# EAGLE board eeZee_microSD (EAGLE 6.4)
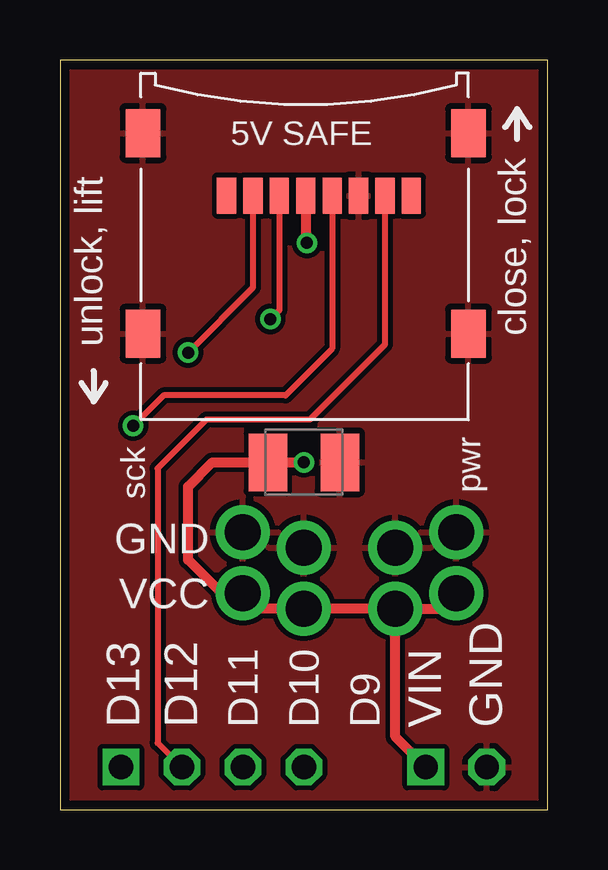
[diagram p0: board, top side]
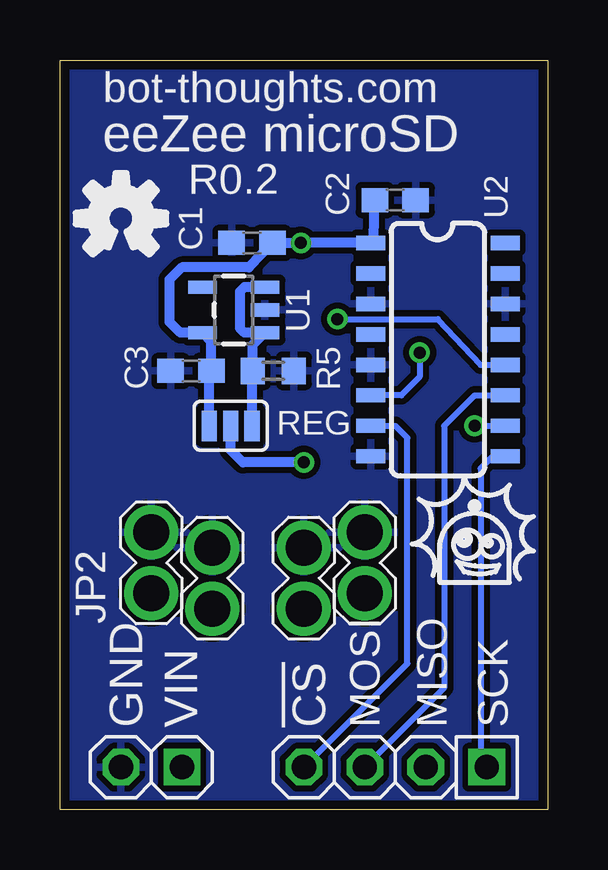
[diagram p1: board, bottom side, seen from below]

Size 20.32 x 31.24 mm. Coordinates in mm from the lower left corner, seen from the top.
Outline: 0,0 20.32,0 20.32,31.24 0,31.24 0,0
Copper layers (1*16): Top 0.0356mm / dielectric 1.5011mm / Bottom 0.0356mm
Design rules "LaenPCBOrder *": minimum track width 6mil, minimum drill 13mil, track to track 6mil, track to pad 6mil, pad to pad 6mil, via to via 6mil, smd to smd 6mil, copper to edge 15mil, drill to drill 6mil, minimum pad ring 7mil, minimum via ring 7mil, stop-mask expansion 4mil, vias tented up to drill 21mil, thermal gap 10mil

## Footprints (pad centres in the part's own frame; a part is rotated, then mirrored left to right if it is on the bottom)
C0603 = smd 1.1 x 1: 1 -0.85,0; 2 0.85,0
SMC_B = smd 1.6 x 2.4: + -1.5,0; - 1.5,0
1X02-S = drill 1.016 square: 1 -1.27,0 | drill 1.016 octagon: 2 1.27,0
BIGPIN-2 = drill 1.5: P$1 0,0; P$2 2.54,0
1X04-S = drill 1.016 square: 1 -3.81,0 | drill 1.016 octagon: 2 -1.27,0; 3 1.27,0; 4 3.81,0
R0603 = smd 1 x 1.1: 1 -0.85,0; 2 0.85,0
SJ_3 = smd 0.635 x 1.27: 1 -0.889,0; 2 0,0; 3 0.889,0
SOT23-5 = smd 0.55 x 1.2: 1 -0.95,-1.3; 2 0,-1.3; 3 0.95,-1.3; 4 0.95,1.3; 5 -0.95,1.3
SO016 = smd 0.6 x 1.2: 1 -4.445,-2.8; 2 -3.175,-2.8; 3 -1.905,-2.8; 4 -0.635,-2.8; 5 0.635,-2.8; 6 1.905,-2.8; 7 3.175,-2.8; 8 4.445,-2.8; 9 4.445,2.8; 10 3.175,2.8; 11 1.905,2.8; 12 0.635,2.8; 13 -0.635,2.8; 14 -1.905,2.8; 15 -3.175,2.8; 16 -4.445,2.8
TFLASH_CP-0000-086 = smd 0.8 x 1.5: CS 8.98,2.6; DI 7.88,2.6; DO 3.48,2.6; GND 4.58,2.6; NC 10.08,2.6; RSV 2.38,2.6; SCLK 5.68,2.6; VDD 6.78,2.6 | smd 1.45 x 2: SHIELD1 0,8.35; SHIELD2 13.56,8.35; SHIELD3 13.56,0; SHIELD4 0,0

## Placement (x,y rotation side)
C1  1uF  [C0603]  12.32,23.62 180 bottom
C2  0.1uF  [C0603]  6.35,25.4 0 bottom
C3  0.1uF  [C0603]  14.86,18.29 180 bottom
C4  10uF  [SMC_B]  10.16,14.48 0 top
JP1  [1X02-S]  16.51,1.78 180 bottom
JP2  PWR  [BIGPIN-2]  16.51,9.02 90 bottom
JP3  PWR  [BIGPIN-2]  10.16,8.38 90 bottom
JP4  PWR  [BIGPIN-2]  13.97,8.38 90 bottom
JP5  PWR  [BIGPIN-2]  7.62,9.02 90 bottom
JP6  [1X04-S]  6.35,1.78 180 bottom
R5  10K  [R0603]  11.43,18.29 180 bottom
REG  BYP  [SJ_3]  13.21,16 0 bottom
U1  MCP1824S  [SOT23-5]  13.08,20.83 90 bottom
U2  74HC4050  [SO016]  4.57,19.18 270 bottom
U$1  MICROSD_TFLASH  [TFLASH_CP-0000-086]  17.02,28.19 180 top

## Library data of the parts
C1 = rcl; PARTNO: LMK107B7105KA-T
C2-C4 = rcl; DATABASE: ./../../../eagle/PARTSDB.TXT; PARTNO: LMK107B7105KA-T
JP1 JP6 = pinhead-2
JP2 JP4 JP5 = mes_electromech; DATABASE: ./../../../eagle/PARTSDB.TXT
JP3 U$1 = mes_electromech
R5 = rcl; DATABASE: ./../PARTSDB.TXT; PARTNO: ERJ-3GEYJ103V
REG U2 = SparkFun
U1 = mes_regulators; IOUT: 300mA; PARTNO: MCP1824ST-3302E/DB; VOUT: 3.3V

## Nets
!CS_HV: JP6.4 U2.7
!SS: U2.6 U$1.CS
GND: C1.2 C2.2 C3.2 C4.- JP1.2 JP2.P$2 JP3.P$2 JP4.P$2 JP5.P$2 R5.1 U1.2 U2.3 U2.5 U2.8 U2.14 U$1.GND U$1.SHIELD1 U$1.SHIELD2 U$1.SHIELD3 U$1.SHIELD4
MISO: JP6.2 U$1.DO
MOSI: U2.12 U$1.DI
MOSI_HV: JP6.3 U2.11
SCK: U2.10 U$1.SCLK
SCK_HV: JP6.1 U2.9
VBOARD: C4.+ JP1.1 JP2.P$1 JP3.P$1 JP4.P$1 JP5.P$1 REG.2
VCC: C1.1 C2.1 C3.1 REG.1 U1.5 U2.1 U$1.VDD
VREGIN: R5.2 REG.3 U1.1 U1.3

## Tracks (layer width: path | path; a pad name or v marks a point on that pad's centre or on a via)
!CS_HV
  Bottom 0.254: JP6.4 5.84,6.1 5.84,15.49 6.35,16 U2.7
!SS  (via drill 0.5)
  Top 0.254: U$1.CS 8.04,21.75 v5.33,19.05
  Bottom 0.254: v5.33,19.05 5.33,18.03 6.1,17.27 U2.6
GND
  pour Bottom (isolate 0.254): 20.32,31.24 20.32,0 0,0 0,31.24
  pour Top (isolate 0.203): 20.32,31.24 20.32,0 0,0 0,31.24
MISO
  Top 0.254: U$1.DO 13.54,19.38 10.41,16.26 6.1,16.26 4.06,14.22 4.06,2.79 JP6.2
MOSI  (via drill 0.5)
  Top 0.254: U$1.DI 9.14,20.82 v8.76,20.45
  Bottom 0.254: v8.76,20.45 4.57,20.45 2.79,18.54 U2.12
MOSI_HV
  Bottom 0.254: JP6.3 4.32,5.08 4.32,16 3.05,17.27 U2.11
SCK  (via drill 0.5)
  Top 0.254: U$1.SCLK 11.34,19.21 9.4,17.27 4.32,17.27 v3.05,16
  Bottom 0.254: v3.05,16 U2.10
SCK_HV
  Bottom 0.254: U2.9 2.29,14.73 2.79,14.22 2.79,2.03 JP6.1
VBOARD  (via drill 0.5)
  Top 0.406: JP1.1 13.97,3.05 JP4.P$1 | JP4.P$1 15.88,8.38 JP2.P$1 | JP4.P$1 JP3.P$1 8.26,8.38 JP5.P$1 6.73,9.02 5.33,10.41 5.33,13.46 6.35,14.48 C4.+ v10.16,14.48
  Bottom 0.406: v10.16,14.48 12.7,14.48 13.21,14.99 REG.2
VCC  (via drill 0.5)
  Top 0.406: U$1.VDD 10.24,23.67 v10.29,23.62
  Bottom 0.406: REG.1 14.1,18.2 C3.1 14.01,19.51 U1.5 15.31,19.88 15.75,20.32 15.75,22.1 15.24,22.61 12.45,22.61 C1.1 v10.29,23.62 U2.1 7.25,23.83 C2.1
VREGIN
  Bottom 0.406: U1.3 12.63,21.78 12.83,21.59 12.83,20.07 12.63,19.88 U1.1 12.28,19.38 R5.2 12.32,18.25 REG.3

## Text on the board
tPlace: close, lock | unlock, lift | GND | VCC | D13 | D12 | D11 | D10 | D9 | VIN | GND
bPlace: SCK | MISO | MOSI | !CS | VIN | GND
tNames: 5V SAFE | sck | pwr
bNames: bot-thoughts.com | eeZee microSD | R0.2
_tsilk: 5V SAFE | close, lock | unlock, lift | sck | pwr | GND | VCC | D13 | D12 | D11 | D10 | D9 | VIN | GND
_bsilk: bot-thoughts.com | eeZee microSD | R0.2 | U2 | C2 | C1 | U1 | R5 | C3 | REG | BYP | SCK | MISO | MOSI | !CS | VIN | GND